# EAGLE board tc2030-back (EAGLE 6.5.0)
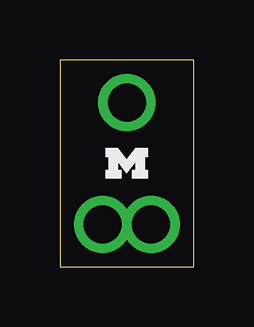
[diagram p0: board, top side]

Size 5.59 x 8.64 mm. Coordinates in mm from the lower left corner, seen from the top.
Outline: 0,0 5.59,0 5.59,8.64 0,8.64 0,0
Copper layers (1*16): Top 0.035mm / dielectric 1.5mm / Bottom 0.035mm
Design rules "default": minimum track width 10mil, minimum drill 24mil, track to track 8mil, track to pad 8mil, pad to pad 8mil, via to via 8mil, smd to smd 8mil, copper to edge 40mil, drill to drill 8mil, minimum pad ring 10mil, minimum via ring 8mil, stop-mask expansion 4mil, vias tented up to drill 0mil, thermal gap 10mil

## Placement (x,y rotation side)
U$2  [UMICH_SOLID_50MIL]  2.79,4.32 0 top

## Library data of the parts
U$2 = logos

## Tracks (layer width: path | path; a pad name or v marks a point on that pad's centre or on a via)
N$1  (via drill 1.59)
  other vias: 1.78,1.78 3.81,1.78 2.79,6.86